# EAGLE board Tayloe Detector v3 (EAGLE 9.1.2)
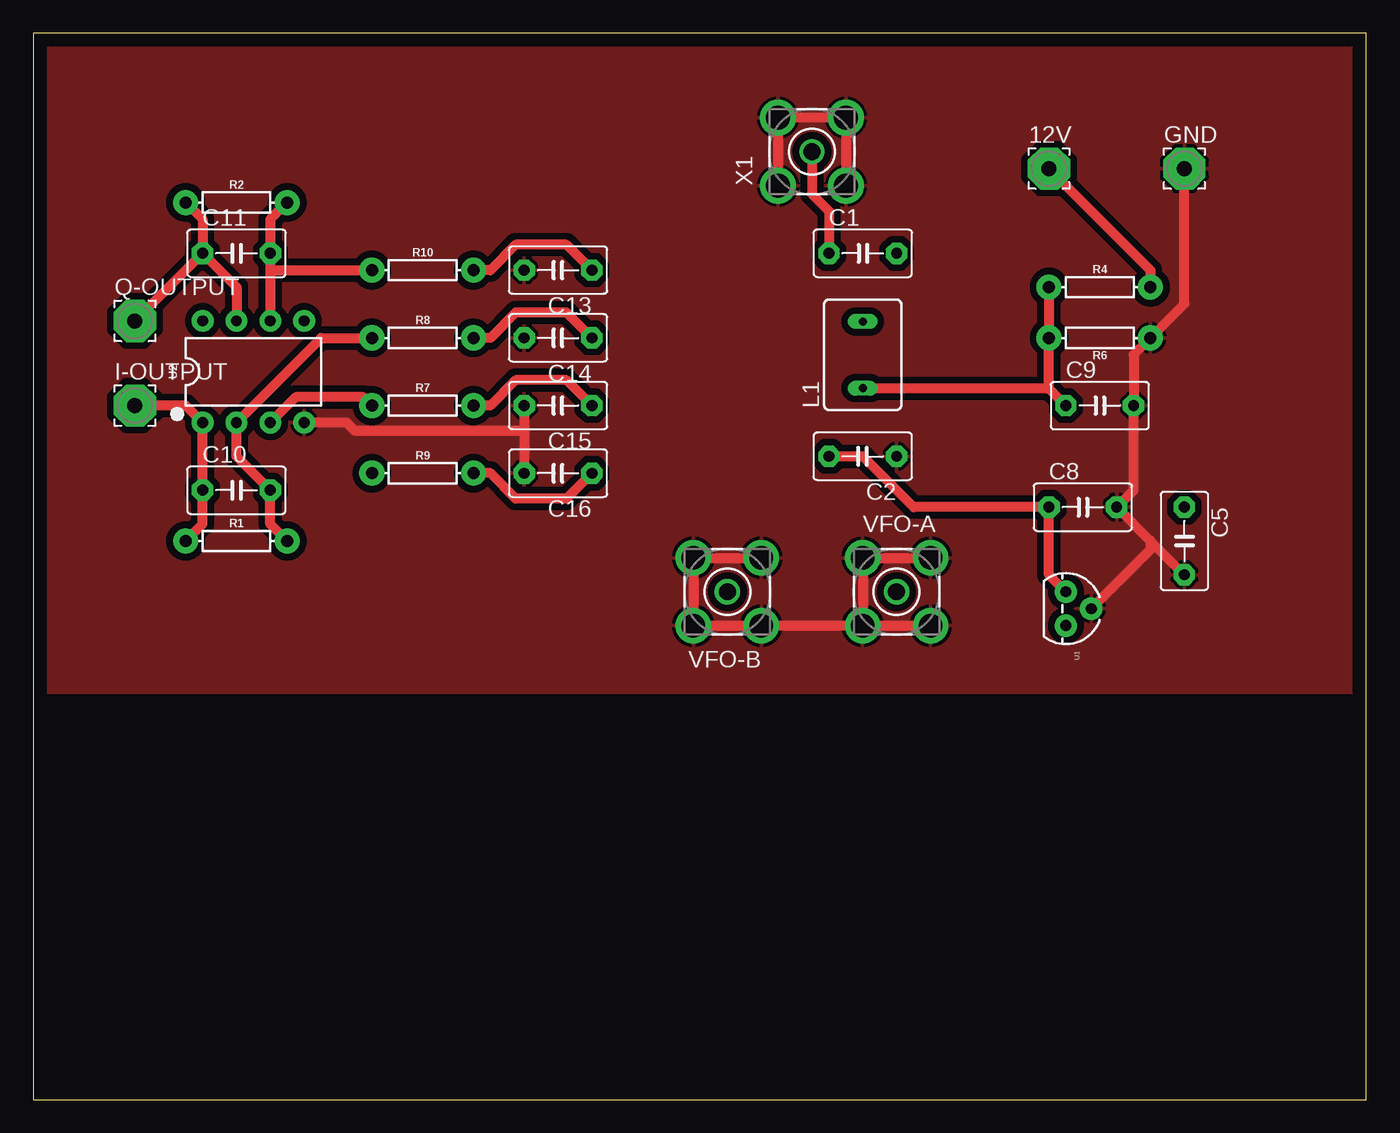
[diagram p0: board, top side]
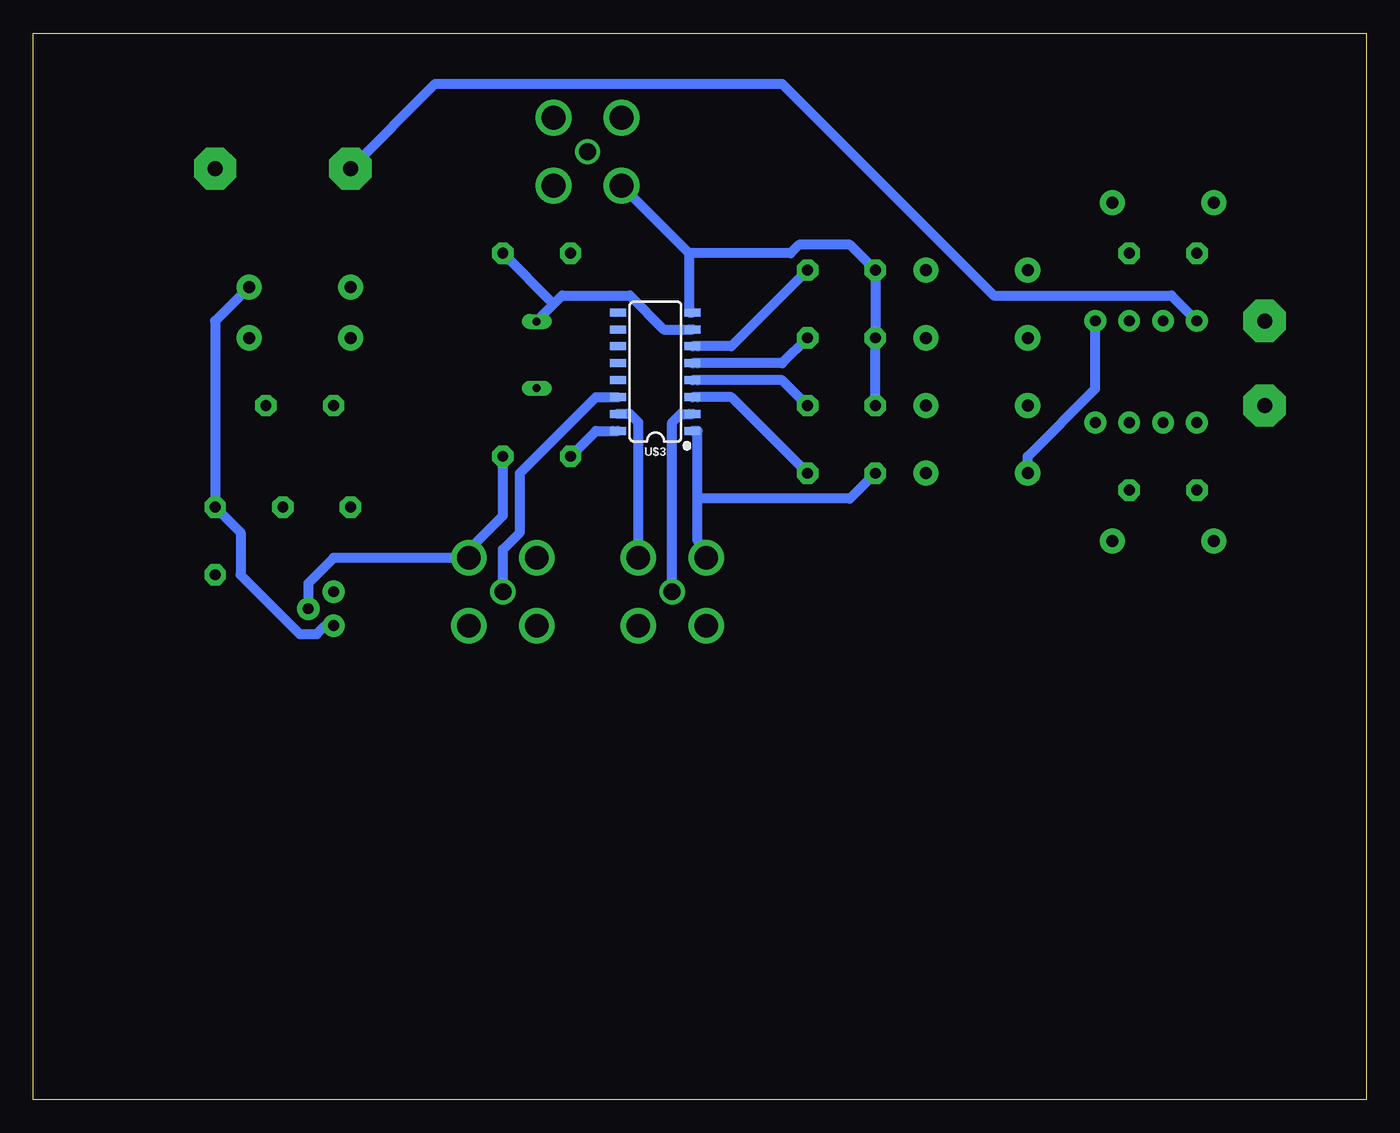
[diagram p1: board, bottom side, seen from below]

Size 100 x 80 mm. Coordinates in mm from the lower left corner, seen from the top.
Outline: 0,0 100,0 100,80 0,80 0,0
Copper layers (1*16): Top 0.035mm / dielectric 1.5mm / Bottom 0.035mm
Design rules "default": minimum track width 6mil, minimum drill 0.35mm, track to track 6mil, track to pad 6mil, pad to pad 6mil, via to via 6mil, smd to smd 6mil, copper to edge 40mil, drill to drill 6mil, minimum pad ring 10mil, minimum via ring 8mil, stop-mask expansion 4mil, vias tented up to drill 0mil, thermal gap 10mil
Net classes: 0 default: width 0.762 mm, drill 0.762 mm, clearance 0.508 mm

## Footprints (pad centres in the part's own frame; a part is rotated, then mirrored left to right if it is on the bottom)
3,17/1,1 = drill 1.118 pad 3.175 octagon: 1 0,0
C5B3.5 = drill 0.813 pad 1.6 octagon: 1 -2.54,0; 2 2.54,0
BS75 = drill 0.6 long: 1 -2.5,0; 2 2.5,0
AXIAL-0.3 = drill 0.9 pad 1.88: P$1 -3.81,0; P$2 3.81,0
TO-92 = drill 0.813 pad 1.676: 1 -1.27,0; 2 0,1.905; 3 1.27,0
DIP08 = drill 0.813 pad 1.626: 1 -3.81,-3.81; 2 -1.27,-3.81; 3 1.27,-3.81; 4 3.81,-3.81; 5 3.81,3.81; 6 1.27,3.81; 7 -1.27,3.81; 8 -3.81,3.81
SO16 = smd 0.6 x 1.2: 1 -4.445,-2.8; 2 -3.175,-2.8; 3 -1.905,-2.8; 4 -0.635,-2.8; 5 0.635,-2.8; 6 1.905,-2.8; 7 3.175,-2.8; 8 4.445,-2.8; 9 4.445,2.8; 10 3.175,2.8; 11 1.905,2.8; 12 0.635,2.8; 13 -0.635,2.8; 14 -1.905,2.8; 15 -3.175,2.8; 16 -4.445,2.8
BU-SMA-V = drill 1.27: 1 0,0 | drill 1.778: 2 -2.55,2.55; 3 2.55,2.55; 4 2.55,-2.55; 5 -2.55,-2.55

## Placement (x,y rotation side)
12V  [3,17/1,1]  76.2,69.85 0 top
C1  33pF  [C5B3.5]  62.23,63.5 0 top
C2  .1uF  [C5B3.5]  62.23,48.26 180 top
C5  100uF  [C5B3.5]  86.36,41.91 270 top
C8  22uf  [C5B3.5]  78.74,44.45 0 top
C9  22uF  [C5B3.5]  80.01,52.07 0 top
C10  10nF  [C5B3.5]  15.24,45.72 0 top
C11  10nF  [C5B3.5]  15.24,63.5 0 top
C13  470nF  [C5B3.5]  39.37,62.23 180 top
C14  470nF  [C5B3.5]  39.37,57.15 180 top
C15  470nF  [C5B3.5]  39.37,52.07 180 top
C16  470nF  [C5B3.5]  39.37,46.99 180 top
GND  [3,17/1,1]  86.36,69.85 0 top
I-OUTPUT  [3,17/1,1]  7.62,52.07 0 top
L1  47uH  [BS75]  62.23,55.88 90 top
Q-OUTPUT  [3,17/1,1]  7.62,58.42 0 top
R1  10k  [AXIAL-0.3]  15.24,41.91 0 top
R2  10k  [AXIAL-0.3]  15.24,67.31 0 top
R4  10k  [AXIAL-0.3]  80.01,60.96 0 top
R6  10k  [AXIAL-0.3]  80.01,57.15 180 top
R7  100  [AXIAL-0.3]  29.21,52.07 0 top
R8  100  [AXIAL-0.3]  29.21,57.15 0 top
R9  100  [AXIAL-0.3]  29.21,46.99 0 top
R10  100  [AXIAL-0.3]  29.21,62.23 0 top
U1  [TO-92]  77.47,36.83 270 top
U2  LM358  [DIP08]  16.51,54.61 0 top
U$3  FST3253  [SO16]  53.34,54.61 90 bottom
VFO-A  BU-SMA-V  [BU-SMA-V]  64.77,38.1 0 top
VFO-B  BU-SMA-V  [BU-SMA-V]  52.07,38.1 180 top
X1  BU-SMA-V  [BU-SMA-V]  58.42,71.12 90 top

## Library data of the parts
12V GND I-OUTPUT Q-OUTPUT = wirepad
C1 C2 C5 C8-C11 C13-C16 = capacitor-wima
L1 = inductor-neosid; OC_FARNELL: unknown; OC_NEWARK: unknown
R1 R2 R4 R6-R10 = SparkFun-Resistors; PROD_ID: RES-12182
U1 = SparkFun-IC-Power
U2 = SparkFun-IC-Amplifiers; PROD_ID: IC-09172
U$3 = SparkFun-IC-Comms
VFO-A VFO-B X1 = con-coax; OC_FARNELL: unknown; OC_NEWARK: unknown

## Nets
5V: C2.2 C8.1 U1.1 U$3.16
GND: C2.1 C5.2 C8.2 C9.2 C13.2 C14.2 C15.2 C16.2 GND.1 R6.P$1 U1.2 U2.4 U$3.1 U$3.8 U$3.15 VFO-A.2 VFO-A.3 VFO-A.4 VFO-A.5 VFO-B.2 VFO-B.3 VFO-B.4 VFO-B.5 X1.2 X1.3 X1.4 X1.5
N$1: C1.1 X1.1
N$2: R7.P$1 U2.3
N$3: C9.1 L1.1 R4.P$1 R6.P$2
N$5: C1.2 L1.2 U$3.7
N$6: C10.2 R1.P$2 R8.P$1 U2.2
N$8: R9.P$1 U2.5
N$10: C10.1 I-OUTPUT.1 R1.P$1 U2.1
N$11: C14.1 R8.P$2 U$3.5
N$12: C11.2 R2.P$2 R10.P$1 U2.6
N$13: C15.1 R7.P$2 U$3.4
N$14: C13.1 R10.P$2 U$3.6
N$15: U$3.14 VFO-A.1
N$16: C11.1 Q-OUTPUT.1 R2.P$1 U2.7
N$17: U$3.2 VFO-B.1
N$18: C16.1 R9.P$2 U$3.3
VCC: 12V.1 C5.1 R4.P$2 U1.3 U2.8

## Tracks (layer width: path | path; a pad name or v marks a point on that pad's centre or on a via)
5V
  Top 0.762: U1.1 76.2,39.37 C8.1 66.04,44.45 62.23,48.26 C2.2
  Bottom 0.762: C2.2 57.78,50.16 56.52,50.16 U$3.16
GND
  Top 0.762: C5.2 83.82,41.91 | 83.82,41.91 C8.2 82.55,45.72 C9.2 82.55,55.88 R6.P$1 86.36,59.69 GND.1 | U1.2 83.82,41.27 83.82,41.91 | VFO-A.2 VFO-A.5 | VFO-A.5 | VFO-A.2 | VFO-A.5 VFO-A.4 | VFO-A.5 | VFO-A.2 VFO-A.3 | VFO-B.4 VFO-B.3 | VFO-B.3 | VFO-B.4 | VFO-B.3 VFO-B.2 55.24,35.56 61.59,35.56 VFO-A.5 | VFO-B.4 VFO-B.5 | X1.4 X1.3 | X1.3 | X1.4 | X1.4 X1.5 | X1.3 X1.2 | C15.2 36.83,50.16 | 36.83,50.16 C16.2 | U2.4 23.5,50.8 24.13,50.16 36.83,50.16
  Bottom 0.762: C2.1 64.77,43.81 67.31,41.27 VFO-A.3 67.94,40.64 77.47,40.64 79.38,38.73 U1.2 | U$3.15 55.88,51.44 55.24,51.44 54.61,50.8 54.61,41.27 VFO-B.5 | 50.16,45.09 50.16,41.91 49.53,41.27 VFO-B.4 | 50.16,45.09 50.16,50.16 U$3.1 | 50.8,63.5 50.8,59.05 U$3.8 | 50.8,63.5 55.24,67.94 X1.2 | C15.2 C14.2 C13.2 38.73,64.14 42.55,64.14 43.18,63.5 50.8,63.5 | 50.16,45.09 38.73,45.09 C16.2
  pour Top: 0,80.01 100.33,80.01 100.33,30.48 0,30.48
N$1
  Top 0.762: C1.1 59.69,66.67 58.42,67.94 X1.1
N$2
  Top 0.762: U2.3 19.68,52.7 24.77,52.7 R7.P$1
N$3
  Top 0.762: R4.P$1 R6.P$2 76.2,53.34 | 76.2,53.34 62.23,53.34 L1.1 | C9.1 76.2,53.34
N$5
  Bottom 0.762: 60.96,59.69 62.23,58.42 L1.2 | 60.96,59.69 60.33,60.33 55.24,60.33 52.7,57.78 50.8,57.78 U$3.7 | 60.96,59.69 C1.2
N$6
  Top 0.762: R1.P$2 17.78,43.18 C10.2 15.24,48.26 U2.2 21.59,57.15 R8.P$1
N$8
  Bottom 0.762: U2.5 20.32,53.34 25.4,48.26 R9.P$1
N$10
  Top 0.762: R1.P$1 12.7,43.18 C10.1 U2.1 11.43,52.07 I-OUTPUT.1
N$11
  Top 0.762: R8.P$2 34.29,57.15 36.2,59.05 40.01,59.05 C14.1
  Bottom 0.762: C14.1 43.81,55.24 50.16,55.24 U$3.5
N$12
  Top 0.762: R2.P$2 17.78,66.04 C11.2 17.78,62.23 | 17.78,62.23 U2.6 | 17.78,62.23 R10.P$1
N$13
  Top 0.762: R7.P$2 34.29,52.07 36.2,53.98 40.01,53.98 C15.1
  Bottom 0.762: C15.1 43.81,53.98 50.16,53.98 U$3.4
N$14
  Top 0.762: R10.P$2 34.29,62.23 36.2,64.14 40.01,64.14 C13.1
  Bottom 0.762: C13.1 47.62,56.52 50.16,56.52 U$3.6
N$15
  Bottom 0.762: VFO-A.1 64.77,41.27 63.5,42.55 63.5,46.99 57.78,52.7 56.52,52.7 U$3.14
N$16
  Top 0.762: C11.1 12.7,66.04 R2.P$1 | U2.7 15.24,60.96 C11.1 | C11.1 Q-OUTPUT.1
N$17
  Bottom 0.762: VFO-B.1 52.07,50.8 51.44,51.44 50.8,51.44 U$3.2
N$18
  Top 0.762: R9.P$2 34.29,46.99 36.2,45.09 40.01,45.09 C16.1
  Bottom 0.762: C16.1 47.62,52.7 50.16,52.7 U$3.3
VCC
  Top 0.762: R4.P$2 83.82,62.23 12V.1
  Bottom 0.762: R4.P$2 86.36,58.42 C5.1 84.45,42.55 84.45,39.37 80.01,34.92 78.74,34.92 78.11,35.56 U1.3 | U2.8 14.61,60.33 27.94,60.33 43.81,76.2 69.85,76.2 12V.1